# Altium PCB Mini Chess Board PCB.PcbDoc
Units mm, origin at the board's own origin, x right, y up, seen from the top; angles counter-clockwise.
Board outline 180 x 180 mm, 2 copper layers (Top Layer, Bottom Layer); 148 components, 54 nets, 343 pads, 0 vias.
Unrouted connection lines stored in the file: 263.
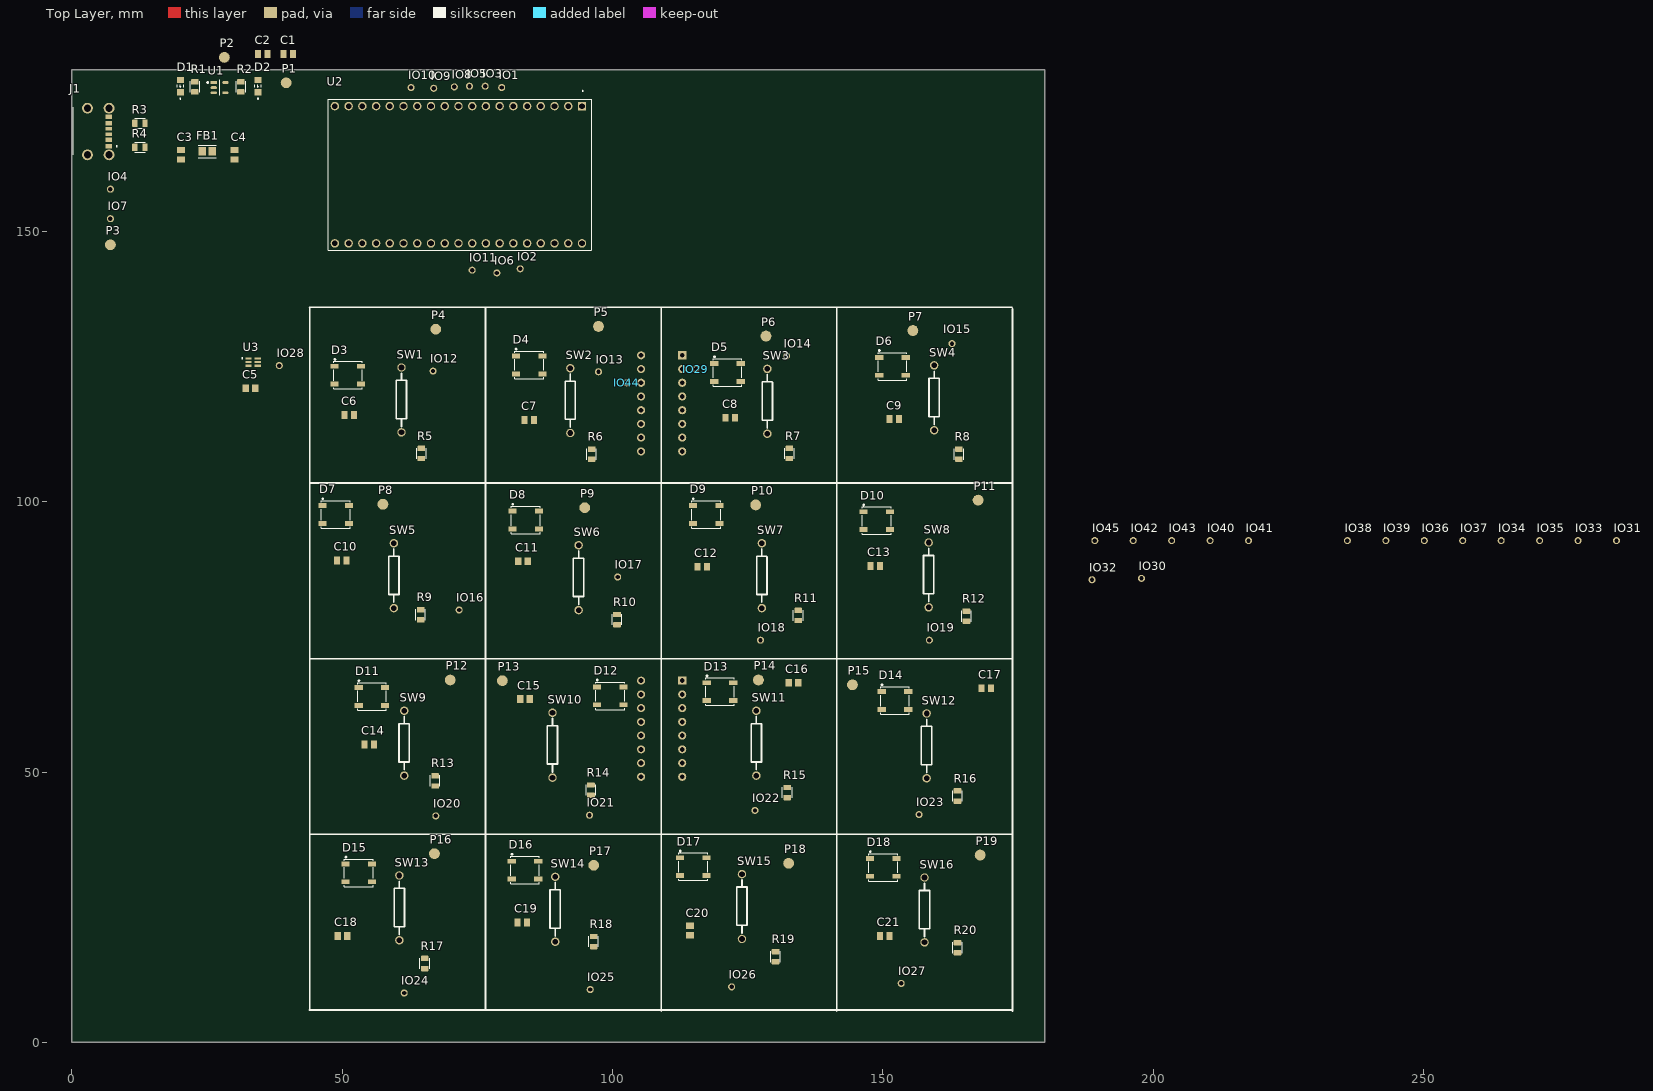
[diagram p0: Top Layer view]
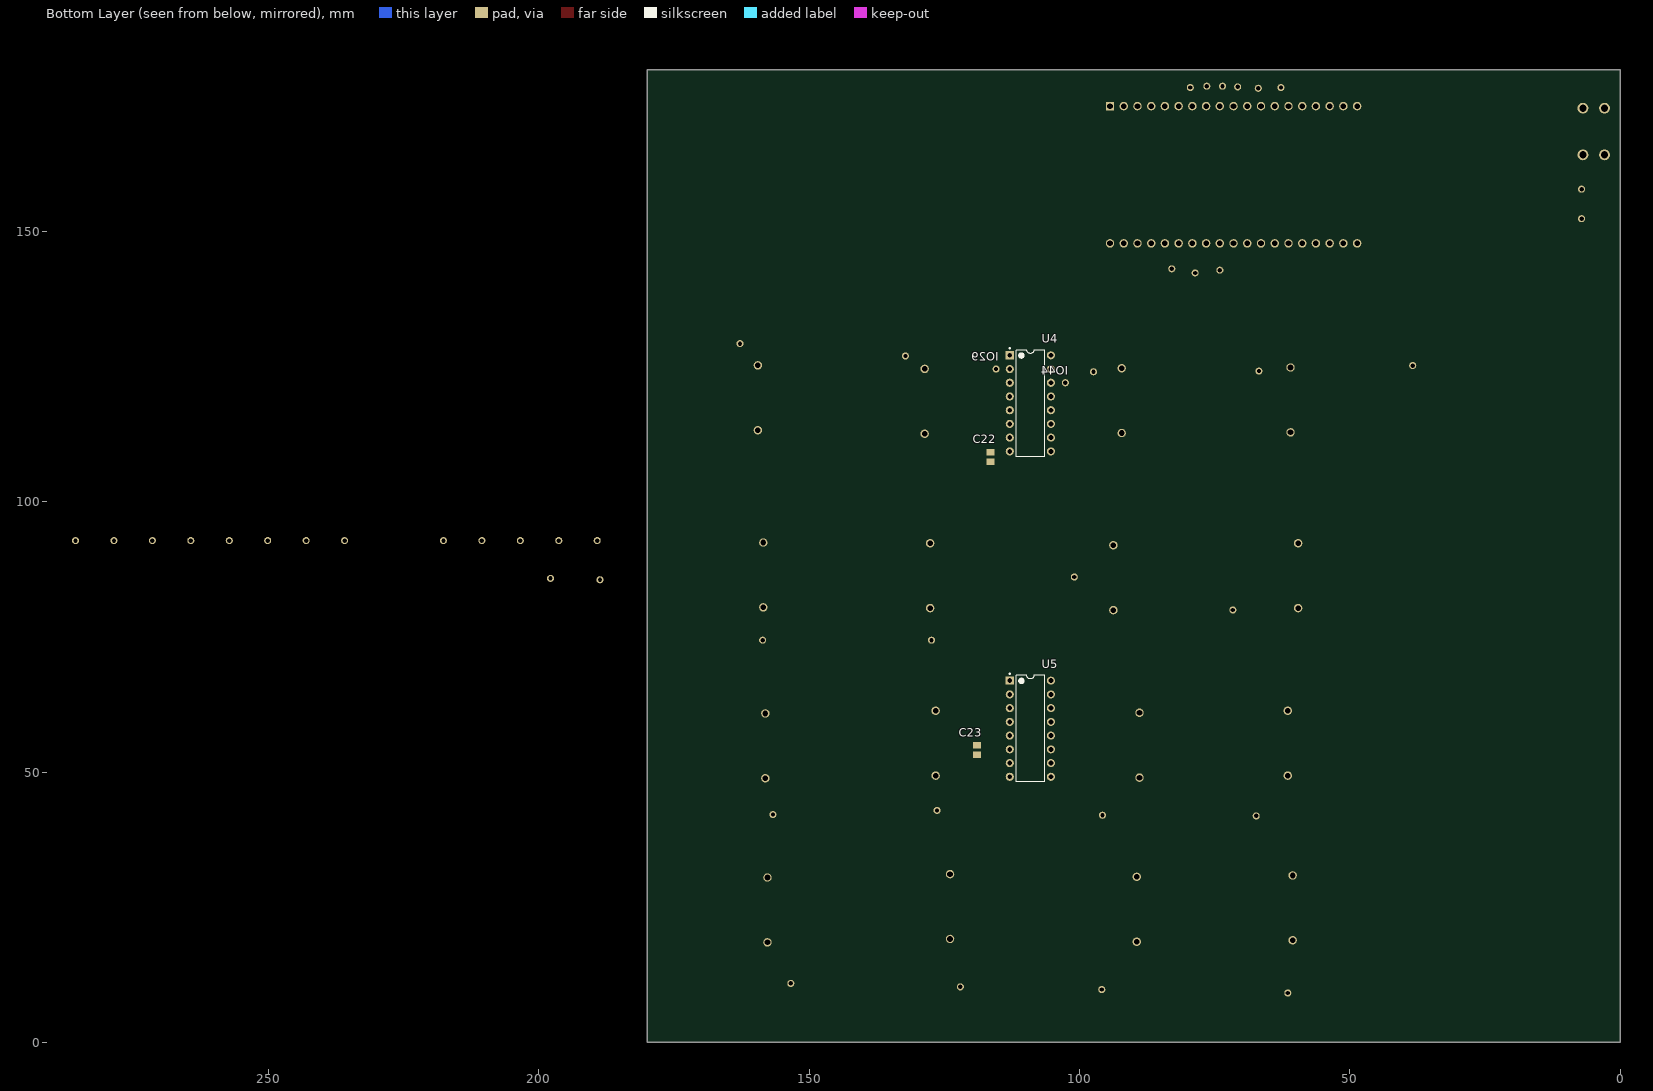
[diagram p1: Bottom Layer view, seen from below]

## Layer stack, top to bottom
Top Solder: solder mask 0.0102, Solder Resist, Dk 3.5
Top Layer: signal copper 0.0356
Dielectric 1: dielectric 0.32, FR-4, Dk 4.8
Bottom Layer: signal copper 0.0356
Bottom Solder: solder mask 0.0102, Solder Resist, Dk 3.5

## Board outline
0,0 180,0 180,180 0,180

## Design rules (kind name [scope] priority, off if disabled: settings)
Clearance [All] p1: gap=0.254 ignorepadtopadclearanceinfootprint=FALSE
PolygonConnect [All] p1: connectstyle=Relief reliefconductorwidth=0.254 reliefentries=4 polygonreliefangle="90 Angle" airgapwidth=0.254
RoutingVias [All] p1: holewidth=0.711 width=1.27 viastyle="Through Hole" minholewidth=0.711 minwidth=1.27 maxholewidth=0.711 maxwidth=1.27
SolderMaskExpansion [All] p1: expansion=0.102 istentingtop=FALSE
SupplyNets "Schematic Supply Nets_3" [InNet('+3V3')] p1: voltage=0.000
SupplyNets "Schematic Supply Nets_2" [InNet('GND')] p2: voltage=0.000
SupplyNets "Schematic Supply Nets_1" [InNet('+VUSB')] p3: voltage=0.000
SupplyNets "Schematic Supply Nets" [InNet('+5V')] p4: voltage=0.000
Width [All] p1: maxlimit=0.254 minlimit=0.254 preferedwidth=0.254
30 further rules are at their usual default settings.

## Classes and differential pairs
component class WS2818B: C5 C6 C7 C8 C9 C10 C11 C12 C13 C14 C15 C16 C17 C18 C19 C20 C21 D3 D4 D5 D6 D7 D8 D9 D10 D11 D12 D13 D14 D15 D16 D17 D18 IO28 U3
component class "Shift Registers": C22 C23 IO29 IO30 IO31 IO32 IO33 IO34 IO35 IO36 IO37 IO38 IO39 IO40 IO41 IO42 IO43 IO44 IO45 U4 U5
component class "Reed Switches": IO12 IO13 IO14 IO15 IO16 IO17 IO18 IO19 IO20 IO21 IO22 IO23 IO24 IO25 IO26 IO27 P4 P5 P6 P7 P8 P9 P10 P11 P12 P13 P14 P15 P16 P17 P18 P19 R5 R6 R7 R8 R9 R10 R11 R12 R13 R14 R15 R16 R17 R18 R19 R20 SW1 SW2 SW3 SW4 SW5 SW6 SW7 SW8 SW9 SW10 SW11 SW12 SW13 SW14 SW15 SW16
component class "MCU and Power Man": 32 C1 C2 C3 C4 D1 D2 FB1 IO1 IO2 IO3 IO4 IO5 IO6 IO7 IO8 IO9 IO10 IO11 J1 P1 P2 P3 R1 R2 R3 R4 U1 U2

## Components (designator, comment, footprint, x,y, rotation, side; value= is the part's Value field where it differs from the comment)
C1 "100nF" "CAP 0805" 40.005,182.88 r0 top value=0603
C2 "10uF" "CAP 0805" 35.306,182.88 r0 top value=0603
C3 "2u2" "CAP 0805" 20.193,164.211 r90 top
C4 "2u2" "CAP 0805" 30.099,164.211 r90 top
C5 "100n" "CAP 0805" 33.02,121.031 r180 top
C6 "100n" "CAP 0805" 51.308,116.078 r180 top
C7 "100n" "CAP 0805" 84.582,115.189 r180 top
C8 "100n" "CAP 0805" 121.802,115.57 r180 top
C9 "100n" "CAP 0805" 152.146,115.316 r180 top
C10 "100n" "CAP 0805" 49.911,89.154 r0 top
C11 "100n" "CAP 0805" 83.439,89.027 r0 top
C12 "100n" "CAP 0805" 116.586,88.011 r0 top
C13 "100n" "CAP 0805" 148.59,88.138 r0 top
C14 "100n" "CAP 0805" 54.991,55.118 r0 top
C15 "100n" "CAP 0805" 83.82,63.5 r0 top
C16 "100n" "CAP 0805" 133.477,66.548 r0 top
C17 "100n" "CAP 0805" 169.173,65.532 r0 top
C18 "100n" "CAP 0805" 50.038,19.685 r0 top
C19 "100n" "CAP 0805" 83.312,22.225 r0 top
C20 "100n" "CAP 0805" 114.3,20.701 r90 top
C21 "100n" "CAP 0805" 150.359,19.685 r0 top
C22 "100n" "CAP 0805" 116.459,108.322 r90 bottom
C23 "100n" "CAP 0805" 118.999,54.102 r90 bottom
D1 "LED 0805" LED_0805 20.066,176.911 r90 top
D2 "LED 0805" LED_0805 34.417,176.911 r90 top
D3 "WS2812B-B/W" WS2812B-B/W 51.054,123.444 r0 top
D4 "WS2812B-B/W" WS2812B-B/W 84.582,125.349 r0 top
D5 "WS2812B-B/W" WS2812B-B/W 121.285,123.952 r0 top
D6 "WS2812B-B/W" WS2812B-B/W 151.802,125.096 r0 top
D7 "WS2812B-B/W" WS2812B-B/W 48.805,97.664 r0 top
D8 "WS2812B-B/W" WS2812B-B/W 83.947,96.647 r0 top
D9 "WS2812B-B/W" WS2812B-B/W 117.348,97.663 r0 top
D10 "WS2812B-B/W" WS2812B-B/W 148.881,96.521 r0 top
D11 "WS2812B-B/W" WS2812B-B/W 55.499,64.008 r0 top
D12 "WS2812B-B/W" WS2812B-B/W 99.605,64.136 r0 top
D13 "WS2812B-B/W" WS2812B-B/W 119.888,64.897 r0 top
D14 "WS2812B-B/W" WS2812B-B/W 152.273,63.246 r0 top
D15 "WS2812B-B/W" WS2812B-B/W 53.086,31.369 r0 top
D16 "WS2812B-B/W" WS2812B-B/W 83.82,31.877 r0 top
D17 "WS2812B-B/W" WS2812B-B/W 114.935,32.512 r0 top
D18 "WS2812B-B/W" WS2812B-B/W 150.114,32.385 r0 top
FB1 "120R" FP-BLM21-0_2-t0_85-e0_5-IPC_A 25.019,164.846 r0 top
IO1 "I/O" I/O 79.502,176.657 r0 top
IO2 "I/O" I/O 82.931,143.129 r90 top
IO3 "I/O" I/O 76.454,176.911 r90 top
IO4 "I/O" I/O 7.112,157.861 r90 top
IO5 "I/O" I/O 73.533,176.911 r90 top
IO6 "I/O" I/O 78.613,142.367 r90 top
IO7 "I/O" I/O 7.112,152.4 r90 top
IO8 "I/O" I/O 70.739,176.784 r90 top
IO9 "I/O" I/O 66.929,176.53 r90 top
IO10 "I/O" I/O 62.738,176.657 r90 top
IO11 "I/O" I/O 74.041,142.875 r90 top
IO12 "I/O" I/O 66.802,124.206 r90 top
IO13 "I/O" I/O 97.409,124.079 r90 top
IO14 "I/O" I/O 132.207,127 r90 top
IO15 "I/O" I/O 162.814,129.286 r90 top
IO16 "I/O" I/O 71.628,80.01 r90 top
IO17 "I/O" I/O 100.965,86.106 r90 top
IO18 "I/O" I/O 127.381,74.422 r90 top
IO19 "I/O" I/O 158.623,74.422 r90 top
IO20 "I/O" I/O 67.31,41.91 r90 top
IO21 "I/O" I/O 95.758,42.037 r90 top
IO22 "I/O" I/O 126.365,42.926 r90 top
IO23 "I/O" I/O 156.718,42.164 r90 top
IO24 "I/O" I/O 61.468,9.144 r90 top
IO25 "I/O" I/O 95.885,9.779 r90 top
IO26 "I/O" I/O 122.047,10.287 r90 top
IO27 "I/O" I/O 153.416,10.922 r90 top
IO28 "I/O" I/O 38.354,125.222 r90 top
IO29 "I/O" I/O 115.443,124.587 r90 top
IO30 "I/O" I/O 197.866,85.852 r90 top
IO31 "I/O" I/O 285.75,92.837 r90 top
IO32 "I/O" I/O 188.722,85.598 r90 top
IO33 "I/O" I/O 278.638,92.837 r90 top
IO34 "I/O" I/O 264.414,92.837 r90 top
IO35 "I/O" I/O 271.526,92.837 r90 top
IO36 "I/O" I/O 250.19,92.837 r90 top
IO37 "I/O" I/O 257.302,92.837 r90 top
IO38 "I/O" I/O 235.966,92.837 r90 top
IO39 "I/O" I/O 243.078,92.837 r90 top
IO40 "I/O" I/O 210.566,92.837 r90 top
IO41 "I/O" I/O 217.678,92.837 r90 top
IO42 "I/O" I/O 196.342,92.837 r90 top
IO43 "I/O" I/O 203.454,92.837 r90 top
IO44 "I/O" I/O 102.616,122.047 r90 top
IO45 "I/O" I/O 189.23,92.837 r90 top
J1 "TYPE-C-31-M-17" TYPEC31M17 4.318,168.529 r270 top
P1 "Probe_5019" Testpoint 39.624,177.546 r0 top
P2 "Probe_5019" Testpoint 28.194,182.245 r0 top
P3 "Probe_5019" Testpoint 7.112,147.574 r0 top
P4 "Probe_5019" Testpoint 67.31,131.953 r0 top
P5 "Probe_5019" Testpoint 97.409,132.461 r0 top
P6 "Probe_5019" Testpoint 128.397,130.683 r0 top
P7 "Probe_5019" Testpoint 155.575,131.699 r0 top
P8 "Probe_5019" Testpoint 57.531,99.568 r0 top
P9 "Probe_5019" Testpoint 94.869,98.933 r0 top
P10 "Probe_5019" Testpoint 126.492,99.441 r0 top
P11 "Probe_5019" Testpoint 167.64,100.33 r0 top
P12 "Probe_5019" Testpoint 69.977,67.056 r0 top
P13 "Probe_5019" Testpoint 79.629,66.929 r0 top
P14 "Probe_5019" Testpoint 127,67.056 r0 top
P15 "Probe_5019" Testpoint 144.399,66.167 r0 top
P16 "Probe_5019" Testpoint 67.056,34.925 r0 top
P17 "Probe_5019" Testpoint 96.52,32.766 r0 top
P18 "Probe_5019" Testpoint 132.588,33.147 r0 top
P19 "Probe_5019" Testpoint 168.021,34.671 r0 top
R1 "1K87" "res 0805" 22.733,176.784 r90 top
R2 "1K87" "res 0805" 31.242,176.784 r90 top
R3 "5K1" "res 0805" 12.573,170.053 r180 top
R4 "5K1" "res 0805" 12.573,165.608 r180 top
R5 "10K" "res 0805" 64.643,108.966 r90 top
R6 "10K" "res 0805" 96.139,108.839 r90 top
R7 "10K" "res 0805" 132.715,108.966 r90 top
R8 "10K" "res 0805" 164.084,108.839 r90 top
R9 "10K" "res 0805" 64.516,79.121 r90 top
R10 "10K" "res 0805" 100.838,78.232 r90 top
R11 "10K" "res 0805" 134.366,78.994 r90 top
R12 "10K" "res 0805" 165.481,78.867 r90 top
R13 "10K" "res 0805" 67.183,48.387 r90 top
R14 "10K" "res 0805" 96.012,46.69 r90 top
R15 "10K" "res 0805" 132.334,46.228 r90 top
R16 "10K" "res 0805" 163.83,45.593 r90 top
R17 "10K" "res 0805" 65.278,14.605 r90 top
R18 "10K" "res 0805" 96.52,18.669 r90 top
R19 "10K" "res 0805" 130.175,15.875 r90 top
R20 "10K" "res 0805" 163.83,17.526 r90 top
SW1 "RI-70GP0710" RI-70GP0710 60.96,118.872 r90 top
SW2 "RI-70GP0710" RI-70GP0710 92.202,118.745 r90 top
SW3 "RI-70GP0710" RI-70GP0710 128.651,118.618 r90 top
SW4 "RI-70GP0710" RI-70GP0710 159.512,119.253 r90 top
SW5 "RI-70GP0710" RI-70GP0710 59.563,86.36 r90 top
SW6 "RI-70GP0710" RI-70GP0710 93.726,85.979 r90 top
SW7 "RI-70GP0710" RI-70GP0710 127.635,86.36 r90 top
SW8 "RI-70GP0710" RI-70GP0710 158.496,86.487 r90 top
SW9 "RI-70GP0710" RI-70GP0710 61.468,55.372 r90 top
SW10 "RI-70GP0710" RI-70GP0710 88.9,54.991 r90 top
SW11 "RI-70GP0710" RI-70GP0710 126.619,55.372 r90 top
SW12 "RI-70GP0710" RI-70GP0710 158.115,54.864 r90 top
SW13 "RI-70GP0710" RI-70GP0710 60.579,24.892 r90 top
SW14 "RI-70GP0710" RI-70GP0710 89.408,24.638 r90 top
SW15 "RI-70GP0710" RI-70GP0710 123.952,25.146 r90 top
SW16 "RI-70GP0710" RI-70GP0710 157.734,24.511 r90 top
U1 "MIC5219-3.3YM5-TR" FP-SOT23-5LD-PL-1-IPC_C 27.305,176.657 r0 top
U2 "ESP32 Dev. Board" ESPRESSIF_ESP32-DEVKITC-32UE 71.501,160.528 r270 top
U3 "74LVC1T45DW-7" 74LVC1T45DW-7 33.528,125.857 r0 top
U4 "CD74HCT166E" N0016A 109.093,118.237 r180 bottom
U5 "CD74HCT166E" N0016A 109.093,58.039 r180 bottom

## Footprints (in the part's own frame and the unit in brackets; to place one, negate y for a bottom-side part, rotate by r counter-clockwise, add the part's x,y. Pads: shape width x height; smd on the part's side, far side on the other; paste and mask are expansions set on the pad)
74LVC1T45DW-7 [mm]
  rect 1.17x0.4 smd: 1(-0.87,0.65) 2(-0.87,0) 3(-0.87,-0.65) 4(0.87,-0.65) 5(0.87,0) 6(0.87,0.65)
  silkscreen extent -2.11,0.61 -1.91,0.81, body extent -1.02,-1.11 1.08,1.04, height 0.92
"CAP 0805" [mm]
  rect 1.15x1.47 smd: 1(-0.88,0) 2(0.88,0)
  body extent -0.8,-0.4 0.8,0.4, height 0.5
ESPRESSIF_ESP32-DEVKITC-32UE [mm]
  rect 1.56x1.56 hole 1.04: 1(-12.7,22.86)
  round 1.56 hole 1.04: 2(-12.7,20.32) 3(-12.7,17.78) 4(-12.7,15.24) 5(-12.7,12.7) 6(-12.7,10.16) 7(-12.7,7.62) 8(-12.7,5.08) 9(-12.7,2.54) 10(-12.7,0) 11(-12.7,-2.54) 12(-12.7,-5.08) 13(-12.7,-7.62) 14(-12.7,-10.16) 15(-12.7,-12.7) 16(-12.7,-15.24) 17(-12.7,-17.78) 18(-12.7,-20.32) 19(-12.7,-22.86) 20(12.7,-22.86) 21(12.7,-20.32) 22(12.7,-17.78) 23(12.7,-15.24) 24(12.7,-12.7) 25(12.7,-10.16) 26(12.7,-7.62) 27(12.7,-5.08) 28(12.7,-2.54) 29(12.7,0) 30(12.7,2.54) 31(12.7,5.08) 32(12.7,7.62) 33(12.7,10.16) 34(12.7,12.7) 35(12.7,15.24) 36(12.7,17.78) 37(12.7,20.32) 38(12.7,22.86)
  silkscreen extent -15.6,-24.1 13.95,24.59, body extent -13.92,-24.62 13.98,24.13, height 7.85
FP-BLM21-0_2-t0_85-e0_5-IPC_A [mm]
  rect 1.455x1.556 smd paste+0 mask+0: 1(-0.926,0) 2(0.926,0)
  silkscreen extent -1.65,-1.18 1.65,1.18, body extent -2.15,-1.28 2.15,1.28, height 0.25
FP-SOT23-5LD-PL-1-IPC_C [mm]
  rect 1.156x0.53 smd paste+0 mask+0: 1(-1.075,0.95)
  rrect100% 1.156x0.53 smd paste+0 mask+0: 2(-1.075,0) 3(-1.075,-0.95) 4(1.075,-0.95) 5(1.075,0.95)
  silkscreen extent -2.33,-1.45 0,1.45, body extent -1.75,-1.55 1.75,1.55, height 0.25
I/O [mm]
  round 1.308 hole 0.8: 1(0,0)
LED_0805 [mm]
  rect 1.15x1.3 smd: 1(-1.125,0) 2(1.125,0)
  silkscreen extent -2.4,-0.63 0.23,0.63, body extent -0.81,-0.4 0.8,0.4, height 0.74
N0016A [mm] "DIP, 16-Leads, Body 19.7x6.6mm, Pitch 2.54mm"
  rect 1.5x1.5 hole 0.9: 1(-3.81,8.89)
  round 1.5 hole 0.9: 2(-3.81,6.35) 3(-3.81,3.81) 4(-3.81,1.27) 5(-3.81,-1.27) 6(-3.81,-3.81) 7(-3.81,-6.35) 8(-3.81,-8.89) 9(3.81,-8.89) 10(3.81,-6.35) 11(3.81,-3.81) 12(3.81,-1.27) 13(3.81,1.27) 14(3.81,3.81) 15(3.81,6.35) 16(3.81,8.89)
  silkscreen extent -3.94,-9.85 2.65,10.31, body extent -3.95,-9.85 3.95,9.85, height 5.08
"res 0805" [mm]
  rrect25% 1x1.42 smd: 1(-0.935,0) 2(0.935,0)
  silkscreen extent -1,-0.89 1,0.89, body extent -0.8,-0.4 0.8,0.46, height 0.48
RI-70GP0710 [mm]
  round 1.56 hole 1.04: 1(-6,0) 2(6,0)
  silkscreen extent -4.95,-0.94 4.95,0.97
Testpoint [mm]
  round 2 smd: 1(0,0)
TYPEC31M17 [mm]
  rect 0.8x1.2 smd: 1(-2.75,2.5) 6(2.75,2.5)
  rect 0.76x1.2 smd: 2(-1.52,2.5) 5(1.52,2.5)
  rect 0.7x1.2 smd: 3(-0.5,2.5) 4(0.5,2.5)
  round 2 hole 1.346: MH1(-4.32,-1.45) MH2(4.32,-1.45) MH3(4.318,2.54) MH4(-4.318,2.54)
  silkscreen extent -4.47,-4.05 4.32,4.05, body extent -4.47,-4.23 4.47,3.18, height 3.16
WS2812B-B/W [mm]
  rect 1.5x0.9 smd: 1(-2.45,1.65) 2(2.45,1.65) 3(-2.45,-1.65) 4(2.45,-1.65)
  silkscreen extent -2.67,-2.54 2.67,3.04, body extent -2.67,-2.5 2.67,2.5, height 1.55

## Part data
C1 C2: library part Cap, "Capacitor", LatestRevisionDate=17-Jul-2002, LatestRevisionNote="Re-released for DXP Platform.", PackageDescription="Radial Cap, Thru-Hole; 2 Leads; 0.3 in Pin Spacing", PackageReference=RAD-0.3, Published=8-Jun-2000, Publisher="Altium Limited"
C3 C4 C5 C6 C7 C8 C9 C10 C11 C12 C13 C14 C15 C16 C17 C18 C19 C20 C21 C22 C23: library part "CAP 0805", Check_prices=https://www.snapeda.com/parts/C2012X8R1H104K125AA/TDK/view-part/?ref=eda, SnapEDA_Link=https://www.snapeda.com/parts/C2012X8R1H104K125AA/TDK/view-part/?ref=snap
D1 D2: "Red LED Indication - Discrete 1.7V 0805 (2012 Metric)", Package=None, Availability=Unavailable, MP=7012X1, Price=None
D3 D4 D5 D6 D7 D8 D9 D10 D11 D12 D13 D14 D15 D16 D17 D18: "SMD5050 RGB LEDs(Built-in IC) ROHS", Manufacturer=Worldsemi, Supplier Part Number=C114586, Manufacturer Part Number=WS2812B-B/W, Supplier=LCSC
FB1: library part CMP-0686-00716-3, "FERRITE BEAD 120 OHM 0603 1LN", Case Code (Imperial)=0805, Case Code (Metric)=2012, Current Rating=800mA, DC Current=200mA, DC Resistance (DCR)=100mR, Frequency=100MHz, Max Current Rating=1A, Max Operating Temperature=125°C, Min Operating Temperature=-55°C, Package Quantity=1, Resistance=150mR, Tolerance=25%, Case/Package=0805, Core Material=Ferrite, DC Resistance-Max=100mR, Depth=1.25mm, Height=0.85mm, Impedance=120R, Lead Free="Lead Free", Length=2mm, Material=Steel, Max DC Current=200mA, Military Standard=Not, Number of Circuits=1, Number of Lines=1, Number of Pins=2, Packaging="Tape and Reel", Radiation Hardening=No, REACH SVHC="No SVHC", Series=BLM21A, Shielding=Unshielded, Termination=SMD/SMT, Test Frequency=100MHz, Width=1.25mm
J1: "TYPE-C-31-M-17 HROPARTS", Package=Package, Check_prices=https://www.snapeda.com/parts/TYPE-C-31-M-17/HRO+Electronics+Co.%252C+Ltd./view-part/?ref=eda, MF="HRO Electronics Co., Ltd.", MP=TYPE-C-31-M-17, SnapEDA_Link=https://www.snapeda.com/parts/TYPE-C-31-M-17/HRO+Electronics+Co.%252C+Ltd./view-part/?ref=snap
P1 P2 P3 P4 P5 P6 P7 P8 P9 P10 P11 P12 P13 P14 P15 P16 P17 P18 P19: "Phosphor Bronze Contact Miniature Silver Plated Surface Mount Test Points", Manufacturer="Keystone Electronics", Manufacturer Part Number=5019, Package Quantity=1, Supplier Part Number 1=06W4636, Body Material=Bronze, Category=Connectors, ComponentLink1Description=https://datasheet.ciiva.com/16318/m60-2p61-16318395.pdf?src-supplier=Future+Electronics, ComponentLink1URL=https://datasheet.ciiva.com/16318/m60-2p61-16318395.pdf?src-supplier=Future+Electronics, ComponentLink2Description=https://datasheet.ciiva.com/16885/70182998-16885945.pdf?src-supplier=Allied+Electronics, ComponentLink2URL=https://datasheet.ciiva.com/16885/70182998-16885945.pdf?src-supplier=Allied+Electronics, ComponentLink3Description=https://datasheet.ciiva.com/14848/m60-2p61-14848437.pdf?src-supplier=Digi-Key, ComponentLink3URL=https://datasheet.ciiva.com/14848/m60-2p61-14848437.pdf?src-supplier=Digi-Key, ComponentLink4Description=https://datasheet.ciiva.com/14848/m60-2p61-14848438.pdf?src-supplier=Digi-Key, ComponentLink4URL=https://datasheet.ciiva.com/14848/m60-2p61-14848438.pdf?src-supplier=Digi-Key, ComponentLink5Description=https://datasheet.ciiva.com/14848/m60-2p61-14848439.pdf?src-supplier=Digi-Key, ComponentLink5URL=https://datasheet.ciiva.com/14848/m60-2p61-14848439.pdf?src-supplier=Digi-Key, Contact Material=Bronze, Contact Plating=Silver, Height=0.09inch, Lead Free="Lead Free", Material=Bronze, Mount="Surface Mount,PCB", Number of Pins=1, Packaging="Tape and Reel", Plating=Silver, Pricing 1="1=0.12300, 1000=0.12300, 2000=0.11700, 4000=0.11300, 6000=0.11000 (USD)", Reach SVHC Compliant=Yes, RoHS=Yes, RoHS Compliant=Yes, Series=5019, Stock 1=148000, Supplier 1=Newark, Termination=SMD/SMT
R1 R2 R3 R4 R5 R6 R7 R8 R9 R10 R11 R12 R13 R14 R15 R16 R17 R18 R19 R20: library part "Resistor 0805", Package=0805, Power_Rating=".25 W", Resistance=.39, Tolerance=1%, Availability=Unavailable, EU_RoHS_Compliance="Compliant with Exemptions", MF="TE Connectivity", MP=2-2176053-2, Price=None, SnapEDA_Link=https://www.snapeda.com/parts/2-2176053-2/TE%20Connectivity/view-part/2214511/?ref=snap
SW1 SW2 SW3 SW4 SW5 SW6 SW7 SW8 SW9 SW10 SW11 SW12 SW13 SW14 SW15 SW16: "Switch Reed Spst-no 500MA 120V", Manufacturer=Comus, Supplier Part Number=1835-1025-ND, ComponentLink1Description=https://www.comus-intl.com/wp-content/uploads/2018/10/RI-70GP.pdf?src-supplier=Digikey, ComponentLink1URL=https://www.comus-intl.com/wp-content/uploads/2018/10/RI-70GP.pdf?src-supplier=Digikey, Manufacturer Part Number=RI-70GP0710, Pricing="1=1.05, 10=1.01, 25=0.9496, 100=0.8201, 250=0.7474, 500=0.69488, 2000=0.6464, 4000=0.5858, 6000=0.5454 (USD)", RoHS=No, Stock=52347, Supplier=Digikey
U1: library part CMP-06324-000027-1, "IC REG LINEAR 3.3V 500MA SOT23-5", Case/Package=SOT-23-5, Dropout Voltage=350mV, Max Input Voltage=12V, Max Operating Temperature=125°C, Min Input Voltage=2.5V, Min Operating Temperature=-40°C, Nominal Output Voltage=3.3V, Output Current=500mA, Lead Free="Lead Free", Mount="Surface Mount", Number of Pins=5, Number of Regulators=1, Output Type=Fixed, Output Voltage=3.3V, Packaging="Cut Tape", REACH SVHC="No SVHC"
U2: "ESP32-WROOM-32UE Series Evaluation Board 802.11 b/g/n (WiFi, WLAN) Bluetooth Smart Ready 4.x Dual Mode", Manufacturer="Espressif Systems", Manufacturer Part Number=ESP32-DEVKITC-32UE, Supplier Part Number=1965-ESP32-DEVKITC-32UE-ND, Category="RF Semiconductors and Devices", ComponentLink1Description=https://www.espressif.com/sites/default/files/documentation/espressif_products_ordering_information_en.pdf?src-supplier=Digikey, ComponentLink1URL=https://www.espressif.com/sites/default/files/documentation/espressif_products_ordering_information_en.pdf?src-supplier=Digikey, ComponentLink2Description=https://datasheet.octopart.com/ESP32-DEVKITC-32UE-Espressif-Systems-datasheet-165560559.pdf?src-supplier=TME, ComponentLink2URL=https://datasheet.octopart.com/ESP32-DEVKITC-32UE-Espressif-Systems-datasheet-165560559.pdf?src-supplier=TME, Pricing="1=10 (USD)", RoHS=No, Stock=498, Supplier=Digikey
U3: "Bus Transceiver, LVC/LCX/Z Series, 1-Func, 1-Bit, True Output, CMOS, PDSO6", Case/Package=TSSOP, Manufacturer=Diodes, Max Operating Temperature=125°C, Max Supply Voltage=5.5V, Min Operating Temperature=-40°C, Min Supply Voltage=1.65V, Nominal Supply Voltage=3.3V, Package Body Material=Plastic, Package Equivalence Code=TSSOP6,.08, Package Shape=Rectangular, Package Style="SMALL OUTLINE, THIN PROFILE, SHRINK PITCHMeter", Supplier Part Number=3070442, Temperature Grade=AUTOMOTIVE, Channels=1, ComponentLink1Description=https://datasheet.ciiva.com:443/pdfs/VipMasterIC/IC/DIOD/DIOD-S-A0006644025/DIOD-S-A0006644025-1.pdf?src-supplier=IHS+Markit, ComponentLink1URL=https://datasheet.ciiva.com:443/pdfs/VipMasterIC/IC/DIOD/DIOD-S-A0006644025/DIOD-S-A0006644025-1.pdf?src-supplier=IHS+Markit, ComponentLink2Description=http://www.mouser.com/ds/2/115/74LVC1T45-318124.pdf?src-supplier=Mouser, ComponentLink2URL=http://www.mouser.com/ds/2/115/74LVC1T45-318124.pdf?src-supplier=Mouser, ComponentLink3Description=https://www.diodes.com/assets/Datasheets/74LVC1T45.pdf?src-supplier=Digikey, ComponentLink3URL=https://www.diodes.com/assets/Datasheets/74LVC1T45.pdf?src-supplier=Digikey, ComponentLink4Description=https://datasheet.octopart.com/74LVC1T45DW-7-Diodes-Inc.-datasheet-160640065.pdf?src-supplier=Newark, ComponentLink4URL=https://datasheet.octopart.com/74LVC1T45DW-7-Diodes-Inc.-datasheet-160640065.pdf?src-supplier=Newark, ComponentLink5Description=http://www.diodes.com/datasheets/74LVC1T45.pdf?src-supplier=Avnet, ComponentLink5URL=http://www.diodes.com/datasheets/74LVC1T45.pdf?src-supplier=Avnet, Control Type="COMMON CONTROL", Count Direction=Bidirectional, Height - Seated (Max)=1.1mm, JESD-30 Code=R-PDSO-G6, JESD-609 Code=e3, Length=2mm, Load/Preset Input=Yes, Logic Type="BUS TRANSCEIVER", Manufacturer Part Number=74LVC1T45DW-7, Max I(ol)=24mA, Moisture Sensitivity Level=1, Number of Bits=1, Number of Ports=2, Output Characteristics=3-STATE, Output Polarity=True, Packaging="Tape and Reel", Pins=6, Power Supplies=3.3V, Pricing="3000=0.0512, 9000=0.0494, 15000=0.0485, 60000=0.0463, 90000=0.0449 (USD)", Qualification Status="Not Qualified", Reach SVHC Compliant=Yes, RoHS=Yes, RoHS Compliant=Yes, Stock=42000, Supplier="Future Electronics", Surface Mount=Yes, Technology=CMOS, Terminal Finish=Tin, Terminal Form="Gull Wing", Terminal Pitch=0.65mm, Terminal Position=DUAL, Width=1.25mm
U4 U5: library part CMP-0807-00166-3, "High Speed CMOS Logic 8-Bit Parallel-In/Serial-Out Shift Register, N0016A, TUBE", F @ Nom Voltage(Max)(Mhz)=25, Generic Part Number=CD74HCT166, ICC @ Nom Voltage(Max)(mA)=0.08, Manufacturer="Texas Instruments", Operating Temperature Range(C)="-55 to 125", Rating=Catalog, tpd @ Nom Voltage(Max)(ns)=50, Voltage(Nom)(V)=5, 3-State Output=No, Bits=8, Code_JEDEC=MS-001, DatasheetVersion=SCHS157C, Input Type=TTL, Output Drive (IOL/IOH)(Max)(mA)=4/-4, Output Type=CMOS, PackageReference=N0016A, PackageVersion=http://www.ti.com/lit/ml/mpdi002c/mpdi002c.pdf, Technology Family=HCT, VCC(Max)(V)=5.5, VCC(Min)(V)=4.5

## Nets (pads, with @x,y where several pads share a name; then routed paths per layer and width w, separated by ;. In a path a pad name is that pad's centre, name@x,y a point inside that pad or via, vN(x,y) a via of type N, cw(c..) or ccw(c..) an arc to the next point about the centre after c; other vN are vias at no path point)
+3V3: C2.2 C5.2 P2.1 R2.2 SW1.2 SW2.2 SW3.2 SW4.2 SW5.2 SW6.2 SW7.2 SW8.2 SW9.2 SW10.2 SW11.2 SW12.2 SW13.2 SW14.2 SW15.2 SW16.2 U1.5 U2.1 U3.1
+5V: C1.2 C4.2 C6.2 C7.2 C8.2 C9.2 C10.2 C11.2 C12.2 C13.2 C14.2 C15.2 C16.2 C17.2 C18.2 C19.2 C20.2 C21.2 C22.2 C23.2 D3.1 D4.1 D5.1 D6.1 D7.1 D8.1 D9.1 D10.1 D11.1 D12.1 D13.1 D14.1 D15.1 D16.1 D17.1 D18.1 FB1.2 IO4.1 P1.1 R1.2 U1.1 U1.3 U3.5 U3.6 U4.9 U4.16 U5.9 U5.16
+VUSB: C3.2 FB1.1 J1.2 J1.5
B: D3.2 IO28.1 U3.4
CP: U2.37 U4.7 U5.7
GND: C1.1 C2.1 C3.1 C4.1 C5.1 C6.1 C7.1 C8.1 C9.1 C10.1 C11.1 C12.1 C13.1 C14.1 C15.1 C16.1 C17.1 C18.1 C19.1 C20.1 C21.1 C22.1 C23.1 D1.1 D2.1 D3.4 D4.4 D5.4 D6.4 D7.4 D8.4 D9.4 D10.4 D11.4 D12.4 D13.4 D14.4 D15.4 D16.4 D17.4 D18.4 IO7.1 J1.1 J1.6 P3.1 R3.1 R4.1 R5.1 R6.1 R7.1 R8.1 R9.1 R10.1 R11.1 R12.1 R13.1 R14.1 R15.1 R16.1 R17.1 R18.1 R19.1 R20.1 U1.2 U2.14 U2.18 U2.32 U2.38 U3.2 U4.1 U4.6 U4.8 U5.6 U5.8
GPIO_1: IO1.1 U2.8
GPIO_2: IO3.1 U2.9
GPIO_3: IO5.1 U2.10
GPIO_4: IO8.1 U2.11
GPIO_5: IO9.1 U2.12
GPIO_6: IO10.1 U2.13
GPIO_7: IO2.1 U2.33
GPIO_8: IO6.1 U2.31
GPIO_9: IO11.1 U2.30
LED_OUT_1: D6.3 D7.2
LED_OUT_2: D10.3 D11.2
LED_OUT_3: D14.3 D15.2
NetD1_2: D1.2 R1.1
NetD2_2: D2.2 R2.1
NetD3_3: D3.3 D4.2
NetD4_3: D4.3 D5.2
NetD5_3: D5.3 D6.2
NetD7_3: D7.3 D8.2
NetD8_3: D8.3 D9.2
NetD9_3: D9.3 D10.2
NetD11_3: D11.3 D12.2
NetD12_3: D12.3 D13.2
NetD13_3: D13.3 D14.2
NetD15_3: D15.3 D16.2
NetD16_3: D16.3 D17.2
NetD17_3: D17.3 D18.2
NetIO33_1: IO33.1 U2.7 U5.13
NetJ1_3: J1.3 R3.2
NetJ1_4: J1.4 R4.2
NetU2_15: U2.15 U3.3
NetU4_13: U4.13 U5.1
nPE: U2.36 U4.15 U5.15
R1: IO12.1 IO45.1 P4.1 R5.2 SW1.1 U5.14
R2: IO13.1 IO43.1 P5.1 R6.2 SW2.1 U5.12
R3: IO14.1 IO41.1 P6.1 R7.2 SW3.1 U5.11
R4: IO15.1 IO39.1 P7.1 R8.2 SW4.1 U5.10
R5: IO16.1 IO30.1 P8.1 R9.2 SW5.1 U5.2
R6: IO17.1 IO32.1 P9.1 R10.2 SW6.1 U5.3
R7: IO18.1 IO35.1 P10.1 R11.2 SW7.1 U5.4
R8: IO19.1 IO37.1 P11.1 R12.2 SW8.1 U5.5
R9: IO20.1 IO44.1 P12.1 R13.2 SW9.1 U4.14
R10: IO21.1 IO42.1 P13.1 R14.2 SW10.1 U4.12
R11: IO22.1 IO40.1 P14.1 R15.2 SW11.1 U4.11
R12: IO23.1 IO38.1 P15.1 R16.2 SW12.1 U4.10
R13: IO24.1 IO29.1 P16.1 R17.2 SW13.1 U4.2
R14: IO25.1 IO31.1 P17.1 R18.2 SW14.1 U4.3
R15: IO26.1 IO34.1 P18.1 R19.2 SW15.1 U4.4
R16: IO27.1 IO36.1 P19.1 R20.2 SW16.1 U4.5
pads on no net: D18.3 J1.MH1 J1.MH2 J1.MH3 J1.MH4 U1.4 U2.2 U2.3 U2.4 U2.5 U2.6 U2.16 U2.17 U2.19 U2.20 U2.21 U2.22 U2.23 U2.24 U2.25 U2.26 U2.27 U2.28 U2.29 U2.34 U2.35

## Silkscreen, mask and mechanical layers (free items; w line width, h text height)
Top Overlay:
  lines w0.3: 43.942,6 173.942,6 ; 43.942,136 173.942,136 ; 44,5.965 44,135.965 ; 44.037,38.5 174.037,38.5 ; 44.037,71 174.037,71 ; 44.037,103.5 174.037,103.5 ; 76.5,5.922 76.5,135.922 ; 109,5.795 109,135.795 ; 141.5,5.795 141.5,135.795 ; 174,5.759 174,135.759